# Altium PCB TS04.PcbDoc
Units mm, origin at the board's own origin, x right, y up, seen from the top; angles counter-clockwise.
Board outline 80 x 50 mm, 2 copper layers (Top Layer, Bottom Layer); 39 components, 27 nets, 89 pads, 40 vias.
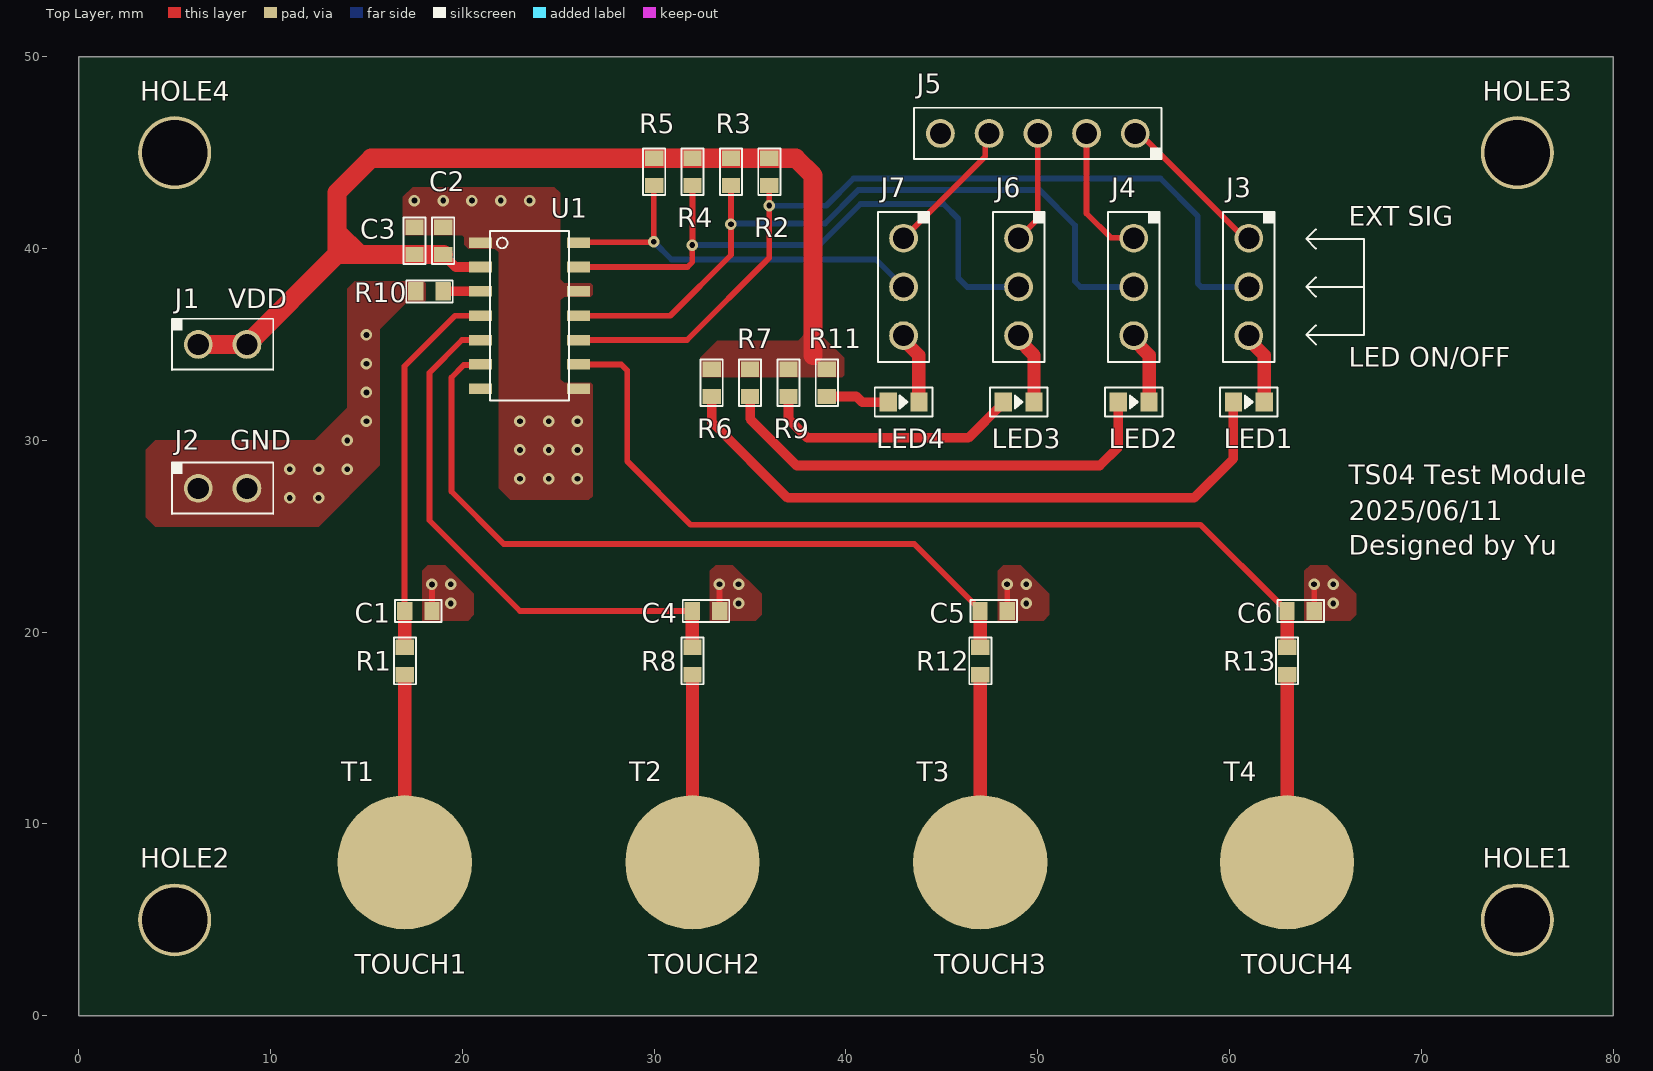
[diagram p0: Top Layer view]
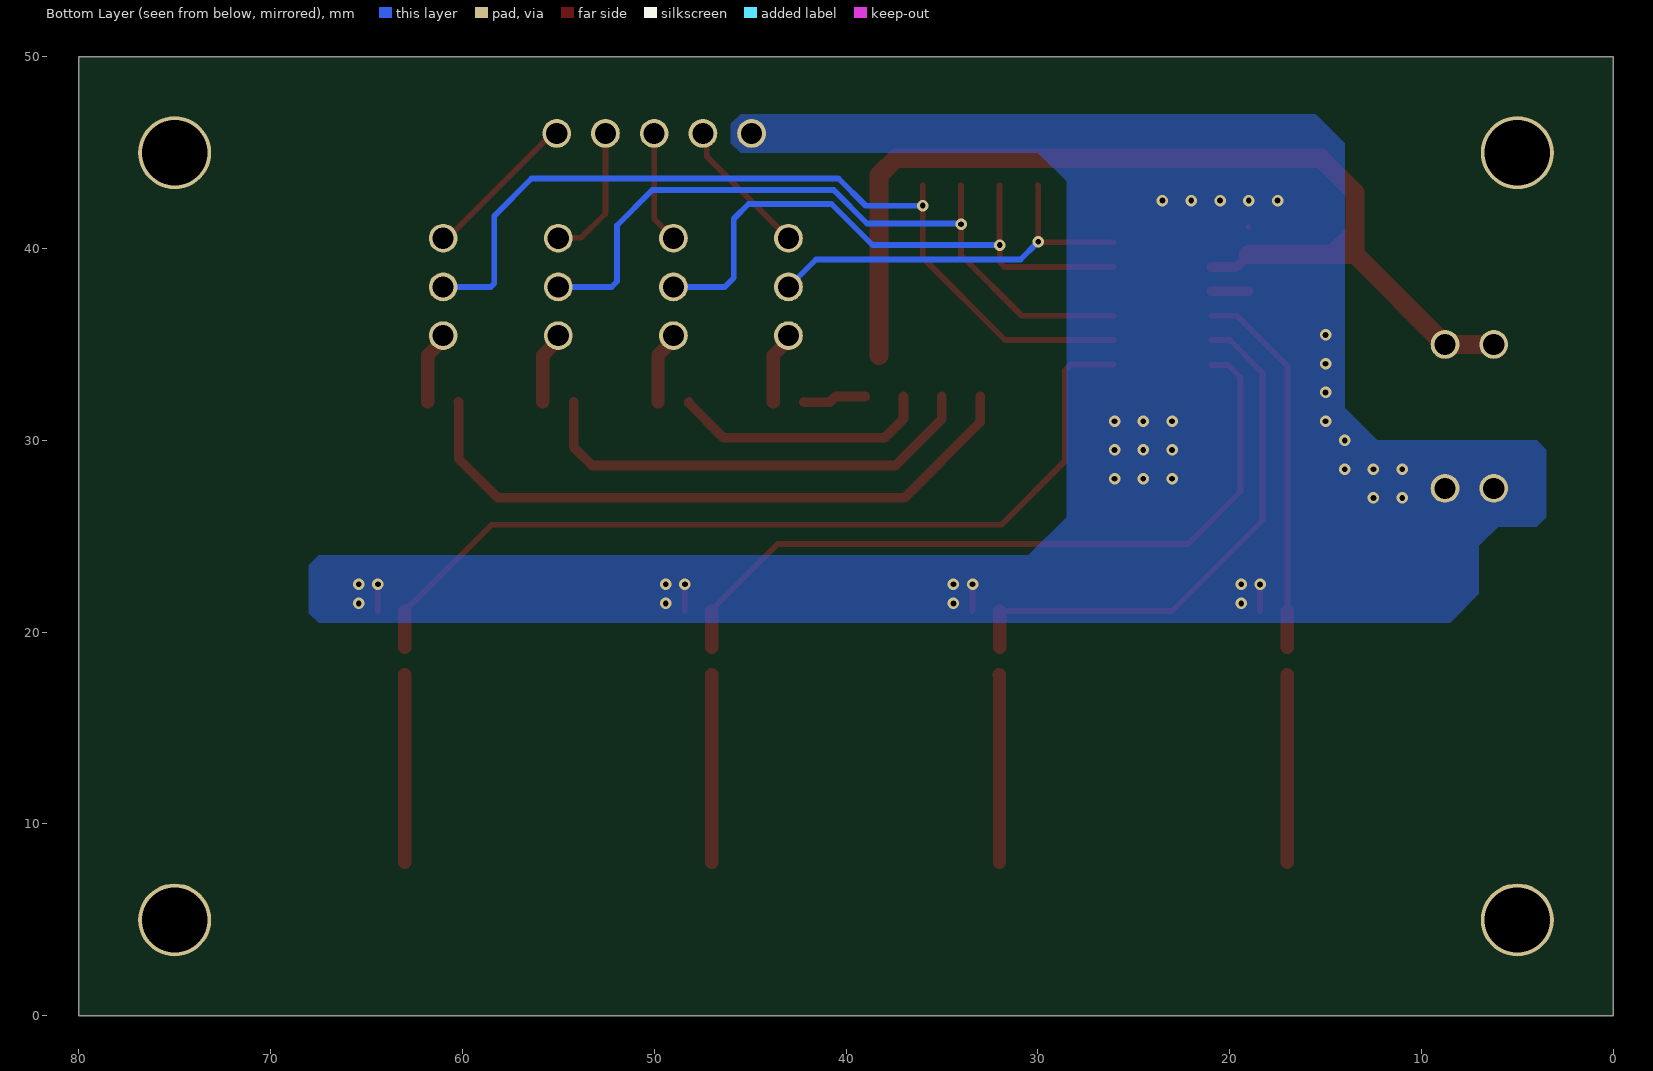
[diagram p1: Bottom Layer view, seen from below]
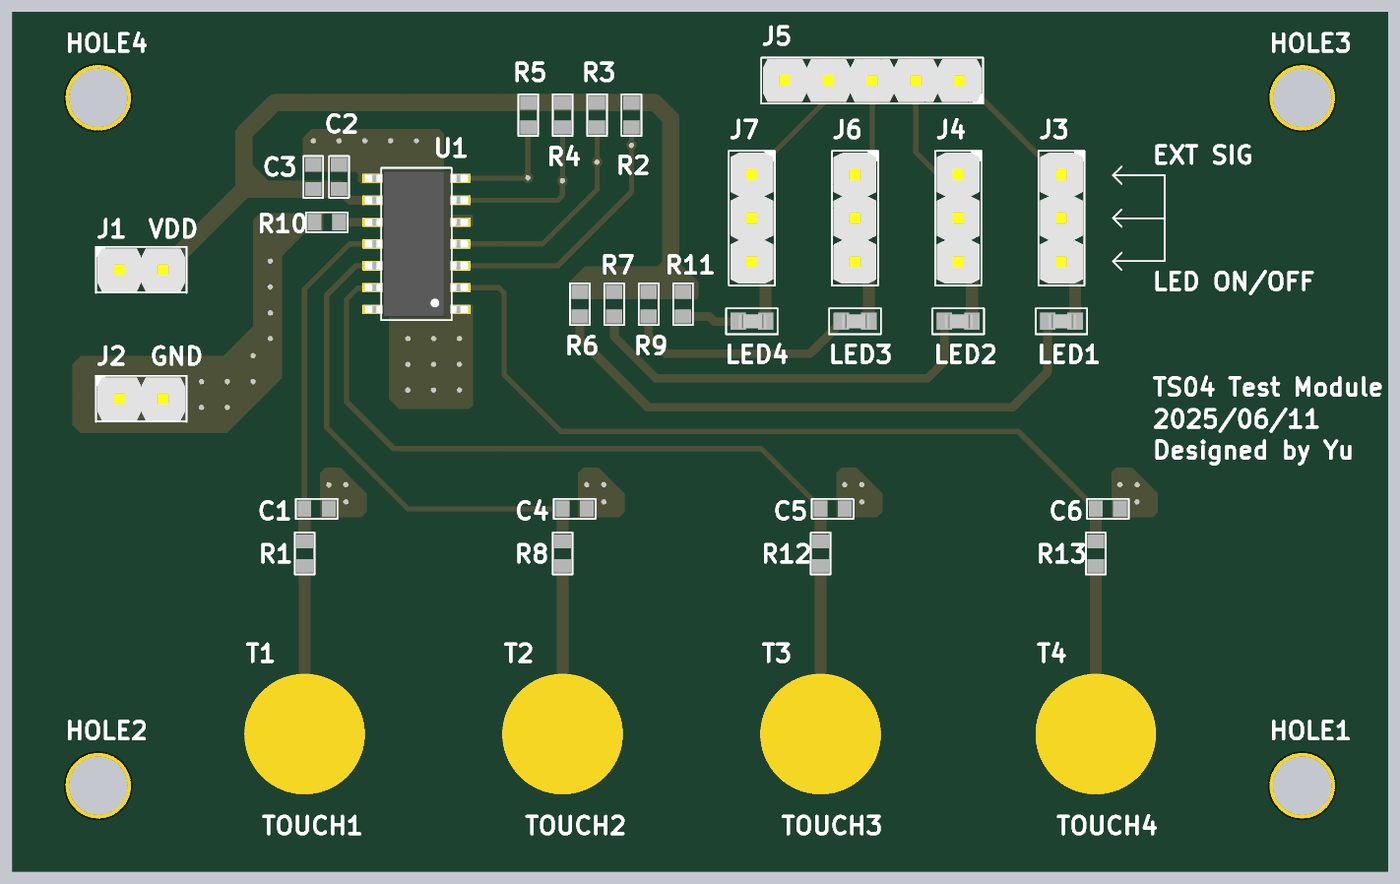
[diagram p2: 3D render of the assembled board from above, using the file's embedded part models]

## Layer stack, top to bottom
Top Solder: solder mask 0.0102, Solder Resist, Dk 3.5
Top Layer: signal copper 0.0356
Dielectric 1: dielectric 0.32, FR-4, Dk 4.8
Bottom Layer: signal copper 0.0356
Bottom Solder: solder mask 0.0102, Solder Resist, Dk 3.5

## Board outline
0,0 0,50 80,50 80,0

## Design rules (kind name [scope] priority, off if disabled: settings)
Clearance [All] p1: gap=0.3 ignorepadtopadclearanceinfootprint=FALSE
HoleSize [All] p1: absolutevalues=TRUE maxlimit=10 minlimit=0.025 maxpercent=80.000 minpercent=20.000
PlaneConnect [All] p1: planeconnectstyle=Direct reliefexpansion=0.508 reliefentries=4 reliefconductorwidth=0.254 reliefairgap=0.254
PolygonConnect [All] p1: connectstyle=Direct reliefconductorwidth=0.254 reliefentries=4 polygonreliefangle="90 Angle" airgapwidth=0.254
RoutingVias [All] p1: holewidth=0.3 width=0.6 viastyle="Through Hole" minholewidth=0.15 minwidth=0.3 maxholewidth=0.5 maxwidth=1
SilkToSolderMaskClearance [IsPad] p1: minsilkscreentomaskgap=0 clearancetoexposedcopper=TRUE
SolderMaskExpansion [All] p1: expansion=0.102 istentingtop=FALSE
SupplyNets "Schematic Supply Nets_1" [InNet('GND')] p1: voltage=0.000
SupplyNets "Schematic Supply Nets" [InNet('VCC')] p2: voltage=0.000
Width [All] p1: maxlimit=1 minlimit=0.05 preferedwidth=0.25
27 further rules are at their usual default settings.

## Components (designator, comment, footprint, x,y, rotation, side; value= is the part's Value field where it differs from the comment)
C1 "10p/50V" C1608 17.7,21.1 r0 top value=100
C2 "100nF/50V" C1608 19,40.4 r90 top value=100
C3 "1uF" C1608 17.5,40.4 r270 top value=100
C4 "10p/50V" C1608 32.7,21.1 r0 top value=100
C5 "10p/50V" C1608 47.7,21.1 r0 top value=100
C6 "10p/50V" C1608 63.7,21.1 r0 top value=100
HOLE1 "Hole" 1.4_pie#1 75,5 r0 top
HOLE2 "Hole" 1.4_pie#1 5,5 r0 top
HOLE3 "Hole" 1.4_pie#2 75.1,44.7 r0 top
HOLE4 "Hole" 1.4_pie#1 5,45 r0 top
J1 "CON2" HEADER_V254_1X2 7.5,35 r0 top
J2 "CON2" HEADER_V254_1X2 7.5,27.5 r0 top
J3 "CON3" HEADER_V254_1X3 61,38 r270 top
J4 "CON3" HEADER_V254_1X3 55,38 r270 top
J5 "CON5" HEADER_V254_1X5 50,46 r180 top
J6 "CON3" HEADER_V254_1X3 49,38 r270 top
J7 "CON3" HEADER_V254_1X3 43,38 r270 top
LED1 "LED" LED/SMD1608 61,32 r180 top
LED2 "LED" LED/SMD1608 55,32 r180 top
LED3 "LED" LED/SMD1608 49,32 r180 top
LED4 "LED" LED/SMD1608 43,32 r180 top
R1 "200R/1608" R1608 17,18.5 r90 top value=100
R2 "10K" R1608 36,44 r90 top value=100
R3 "10K" R1608 34,44 r90 top value=100
R4 "10K" R1608 32,44 r90 top value=100
R5 "10K" R1608 30,44 r90 top value=100
R6 "2K" R1608 33,33 r270 top value=100
R7 "2K" R1608 35,33 r270 top value=100
R8 "200R/1608" R1608 32,18.5 r90 top value=100
R9 "2K" R1608 37,33 r270 top value=100
R10 "510K" R1608 18.287,37.77 r0 top value=100
R11 "2K" R1608 39,33 r270 top value=100
R12 "200R/1608" R1608 47,18.5 r90 top value=100
R13 "200R/1608" R1608 63,18.5 r90 top value=100
T1 "TouchPad" TOUCHPAD 17,8 r0 top
T2 "TouchPad" TOUCHPAD 32,8 r0 top
T3 "TouchPad" TOUCHPAD 47,8 r0 top
T4 "TouchPad" TOUCHPAD 63,8 r0 top
U1 "Capacitive Touch Sensor" TS04_SOP14 23.5,36.5 r0 top

## Footprints (in the part's own frame and the unit in brackets; to place one, negate y for a bottom-side part, rotate by r counter-clockwise, add the part's x,y. Pads: shape width x height; smd on the part's side, far side on the other; paste and mask are expansions set on the pad)
1.4_pie#1 [mm]
  round 3.8 hole 3.4: 1(0,0)
1.4_pie#2 [mm]
  round 3.8 hole 3.4: 1(-0.1,0.3)
C1608 [mm]
  rrect3% 0.8x0.95 smd paste+0 mask+0: 1(-0.713,0)
  rrect3% 0.8x0.95 smd mask+0: 2(0.713,0)
  silkscreen extent -1.21,-0.58 1.21,0.58, body extent -0.8,-0.4 0.8,0.4, height 0.83
HEADER_V254_1X2 [mm] "PIN HEADER 2.54mm 1x2 DIP VERTICAL(STANDARD : SAMTEC)"
  round 1.5 hole 1.1 mask+0: 1(-1.27,0) 2(1.27,0)
  silkscreen extent -2.69,-1.34 2.64,1.34, body extent -2.54,-1.25 2.54,1.24, height 4.97
HEADER_V254_1X3 [mm] "PIN HEADER 2.54mm 1x3 DIP VERTICAL(STANDARD : SAMTEC)"
  round 1.5 hole 1.1 mask+0: 1(-2.54,0) 2(0,0) 3(2.54,0)
  silkscreen extent -3.91,-1.34 3.91,1.34, body extent -3.81,-1.24 3.81,1.24, height 4.97
HEADER_V254_1X5 [mm] "PIN HEADER 2.54mm 1x5 DIP VERTICAL(STANDARD : SAMTEC)"
  round 1.5 hole 1.1 mask+0: 1(-5.08,0) 2(-2.54,0) 3(0,0) 4(2.54,0) 5(5.08,0)
  silkscreen extent -6.45,-1.34 6.45,1.34, body extent -6.35,-1.26 6.35,1.25, height 4.97
LED/SMD1608 [mm]
  rect 0.9x1 smd mask+0: 1(-0.8,0) 2(0.8,0)
  silkscreen extent -1.5,-0.75 1.5,0.75, body extent -0.85,-0.4 0.75,0.4, height 0.82
R1608 [mm]
  rrect3% 0.8x0.95 smd paste+0 mask+0: 1(-0.713,0)
  rrect3% 0.8x0.95 smd mask+0: 2(0.713,0)
  silkscreen extent -1.21,-0.58 1.21,0.58, body extent -0.8,-0.4 0.8,0.4, height 0.83
TOUCHPAD [mm]
  round 7 smd paste-2539.97 mask+0: 1(-0.004,0)
TS04_SOP14 [mm] "AD Semiconductor Touch IC"
  rrect1% 1.2x0.55 smd paste-2539.97 mask+0: 1(-2.55,3.81) 2(-2.55,2.54) 3(-2.55,1.27) 4(-2.55,0) 5(-2.55,-1.27) 6(-2.55,-2.54) 7(-2.55,-3.81) 8(2.55,-3.81) 9(2.55,-2.54) 10(2.55,-1.27) 11(2.55,0) 12(2.55,1.27) 13(2.55,2.54) 14(2.55,3.81)
  silkscreen extent -2.05,-4.43 2.05,4.43, body extent -3,-4.28 3,4.28, height 1.8

## Part data
C1 C2 C3 C4 C5 C6: library part CHIP_CAP, "SMD TYPE CAPACITOR"
R1 R2 R3 R4 R5 R6 R7 R8 R9 R10 R11 R12 R13: library part CHIP_RES, "SMD TYPE RESISTOR"
U1: library part TS04_SOP14, "Capacitive Touch Sensor from AD Semiconductor SOP14 Type"

## Via types
v1: diameter 0.6, hole 0.3, Top Layer to Bottom Layer, tented both sides, 40 vias

## Nets (pads, with @x,y where several pads share a name; then routed paths per layer and width w, separated by ;. In a path a pad name is that pad's centre, name@x,y a point inside that pad or via, vN(x,y) a via of type N, cw(c..) or ccw(c..) an arc to the next point about the centre after c; other vN are vias at no path point)
EXT1: J3.1 J5.1 | length 8.2
  Top Layer w0.3: J5.1 55.31,46 60.77,40.54 J3.1
EXT2: J4.1 J5.2 | length 7.2
  Top Layer w0.3: J5.2 52.54,41.83 53.8,40.57 54.97,40.57 J4.1
EXT3: J5.3 J6.1 | length 5.9
  Top Layer w0.3: J6.1 50,41.54 J5.3
EXT4: J5.4 J7.1 | length 7.3
  Top Layer w0.3: J7.1 47.26,44.8 47.26,45.8 J5.4
GND: C1.2 C2.2 C3.1 C4.2 C5.2 C6.2 J2.1 J2.2 J5.5 R10.1 U1.1 U1.8 U1.12 | length 5.6
  Top Layer w0.3: C1.2 v1(18.413,22.487) ; v1(33.4,22.5) 33.407,22.493 33.407,21.106 C4.2 ; v1(48.4,22.5) 48.413,22.487 C5.2 ; v1(64.4,22.5) 64.413,22.487 C6.2
  Bottom Layer w0.3: v1@18.407,22.493 v1(18.413,22.487)
  other v1: 19.4,21.5 34.4,21.5 49.4,21.5 65.4,21.5 19.4,22.5 34.4,22.5 49.4,22.5 65.4,22.5 11,27 12.5,27 23,28 24.5,28 26,28 11,28.5 12.5,28.5 14,28.5 23,29.5 24.5,29.5 26,29.5 14,30 15,31 23,31 24.5,31 26,31 15,32.5 15,34 15,35.5 17.5,42.5 19,42.5 20.5,42.5 22,42.5 23.5,42.5
LED1: J3.3 LED1.1 | length 3.8
  Top Layer w0.7: J3.3 61,35.244 61.8,34.444 LED1.1
LED2: J4.3 LED2.1 | length 3.8
  Top Layer w0.7: J4.3 55,35.244 55.8,34.444 LED2.1
LED3: J6.3 LED3.1 | length 3.8
  Top Layer w0.7: J6.3 49,35.244 49.8,34.444 LED3.1
LED4: J7.3 LED4.1 | length 3.8
  Top Layer w0.7: J7.3 43,35.244 43.8,34.444 LED4.1
NetLED1_2: LED1.2 R6.2 | length 34
  Top Layer w0.5: R6.2 33,30.96 36.96,27 58.15,27 60.19,29.04 60.19,31.99 LED1.2
NetLED2_2: LED2.2 R7.2 | length 24.1
  Top Layer w0.5: R7.2 35,31.12 37.43,28.69 53.23,28.69 54.2,29.66 LED2.2
NetLED3_2: LED3.2 R9.2 | length 13.6
  Top Layer w0.5: R9.2 37,31.12 37.99,30.13 46.38,30.13 48.2,31.95 LED3.2
NetLED4_2: LED4.2 R11.2 | length 3.3
  Top Layer w0.5: R11.2 40.543,32.287 40.84,31.99 42.19,31.99 LED4.2
NetR1_1: R1.1 T1.1 | length 9.8
  Top Layer w0.7: T1.1 16.998,8.002 16.998,17.786 R1.1
NetR8_1: R8.1 T2.1 | length 9.8
  Top Layer w0.7: T2.1 31.998,8.002 31.998,17.786 R8.1
NetR10_2: R10.2 U1.3 | length 1.9
  Top Layer w0.5: R10.2 U1.3
NetR12_1: R12.1 T3.1 | length 9.8
  Top Layer w0.7: T3.1 46.998,8.002 46.998,17.785 R12.1
NetR13_1: R13.1 T4.1 | length 9.8
  Top Layer w0.7: T4.1 T4.1 62.998,17.785 R13.1
OUT1: J3.2 R2.1 U1.10 | length 45.5
  Top Layer w0.3: U1.10 31.71,35.23 36,39.52 v1(36,42.24) R2.1
  Bottom Layer w0.3: v1(36,42.24) 36.01,42.23 38.971,42.23 40.391,43.65 56.39,43.65 58.34,41.7 58.34,38.176 58.516,38 J3.2
OUT2: J4.2 R3.1 U1.11 | length 38.4
  Top Layer w0.3: U1.11 30.84,36.5 34,39.66 v1(34,41.27) R3.1
  Bottom Layer w0.3: v1(34,41.27) 34.04,41.31 38.9,41.31 40.64,43.05 50.1,43.05 51.94,41.21 51.94,38.29 52.23,38 J4.2
OUT3: J6.2 R4.1 U1.13 | length 31.5
  Top Layer w0.3: U1.13 31.73,39.04 31.99,39.3 v1(31.99,40.18) ; v1@32,40.18 R4.1
  Bottom Layer w0.3: v1(31.99,40.18) 38.619,40.18 40.759,42.32 45.08,42.32 45.85,41.55 45.85,38.47 46.32,38 J6.2
OUT4: J7.2 R5.1 U1.14 | length 20.9
  Top Layer w0.3: U1.14 26.07,40.33 29.96,40.33 v1(29.98,40.35) 29.98,43.268 R5.1
  Bottom Layer w0.3: v1(29.98,40.35) 30.9,39.43 41.57,39.43 J7.2
TOUCH1: C1.1 R1.2 U1.4 | length 19.7
  Top Layer w0.3: C1.1 16.987,33.868 19.62,36.5 U1.4
  Top Layer w0.7: C1.1 16.994,21.094 16.994,19.219 R1.2
TOUCH2: C4.1 R8.2 U1.5 | length 28.6
  Top Layer w0.3: U1.5 19.98,35.23 18.28,33.53 18.28,25.83 23.01,21.1 C4.1 C4.1@31.994,21.094 ; R8.2@31.994,19.219 R8.2
  Top Layer w0.7: R8.2@31.994,19.219 C4.1@31.994,21.094
TOUCH3: C5.1 R12.2 U1.6 | length 39.8
  Top Layer w0.3: U1.6 20.916,33.926 20.076,33.926 19.43,33.281 19.43,27.33 22.16,24.6 43.562,24.6 46.988,21.175 C5.1 C5.1@46.994,21.094 ; R12.2@46.994,19.219 R12.2
  Top Layer w0.7: R12.2@46.994,19.219 C5.1@46.994,21.094
TOUCH4: C6.1 R13.2 U1.9 | length 47
  Top Layer w0.3: U1.9 28.28,33.96 28.59,33.65 28.59,28.91 31.9,25.6 58.487,25.6 62.662,21.425 62.737,21.425 62.994,21.169 C6.1@62.994,21.094
  Top Layer w0.7: C6.1@62.994,21.094 62.994,19.219 R13.2
VCC: C2.1 C3.2 J1.1 J1.2 R2.2 R3.2 R4.2 R5.2 R6.1 R7.1 R9.1 R11.1 U1.2 | length 57.2
  Top Layer w0.5: C2.1 19.075,39.688 19.225,39.537 19.225,39.462 19.648,39.04 U1.2
  Top Layer w1: J1.1 J1.2 13.457,39.688 ; C3.2 14.65,39.688 ; C3.2 C2.1 ; 38.288,34.425 38.288,43.806 37.38,44.713 R2.2 R3.2 R4.2 R5.2 15.253,44.713 13.457,42.917 13.457,40.88 ; 13.457,39.688 14.65,39.688 ; 13.457,39.688 13.457,40.88 ; 13.457,40.88 14.65,39.688
pads on no net: HOLE1.1 HOLE2.1 HOLE3.1 HOLE4.1 U1.7

## Polygon pours and split planes (outlines as drawn)
GND on Top Layer "NONET_L01_P-001" (solid, pour order 8): 18.1,37.3 18,37.2 17.1,37.2 15.7,35.8 15.7,28.7 12.5,25.5 4,25.5 3.5,26 3.5,29.5 4,30 12.3,30 14,31.7 14,37.9 14.4,38.3 18,38.3 18.1,38.2
GND on Top Layer "NONET_L01_P-001" (solid, pour order 7): 21.9,27.5 22.5,26.9 26.6,26.9 26.8,27.1 26.8,32.9 26.7,33 25.3,33 25.1,33.2 25.1,37.3 25.3,37.5 26.7,37.5 26.8,37.6 26.8,38.1 26.7,38.2 25.3,38.2 25.1,38.4 25.1,42.9 24.8,43.2 17.4,43.2 16.9,42.7 16.9,40.8 17,40.7 20,40.7 20.1,40.6 20.1,40.2 20.3,40 21.7,40 21.9,39.8
GND on Top Layer "NONET_L01_P-001" (solid, pour order 6): 64.9,20.6 64.8,20.5 64,20.5 63.9,20.6 63.9,23.2 64.2,23.5 65.1,23.5 66.6,22 66.6,20.9 66.3,20.6
GND on Top Layer "NONET_L01_P-001" (solid, pour order 5): 48.9,20.6 48.8,20.5 48,20.5 47.9,20.6 47.9,23.2 48.2,23.5 49.1,23.5 50.6,22 50.6,20.9 50.3,20.6
GND on Top Layer "NONET_L01_P-001" (solid, pour order 4): 33.9,20.6 33.8,20.5 33,20.5 32.9,20.6 32.9,23.2 33.2,23.5 34.1,23.5 35.6,22 35.6,20.9 35.3,20.6
GND on Top Layer "NONET_L01_P-001" (solid, pour order 3): 18.9,20.6 18.8,20.5 18,20.5 17.9,20.6 17.9,23.2 18.2,23.5 19.1,23.5 20.6,22 20.6,20.9 20.3,20.6
VCC on Top Layer "NONET_L01_P-001" (solid, pour order 0): 32.5,33.3 32.4,33.4 32.4,34.3 33.3,35.2 37.5,35.2 37.9,35.6 38.6,35.6 39,35.2 39.9,34.3 39.9,33.4 39.8,33.3
GND on Bottom Layer "NONET_L01_P-001" (solid, pour order 2): 12.3,30 14,31.7 14,45.5 15.5,47 45.5,47 46,46.5 46,45.5 45.5,45 30,45 28.5,43.5 28.5,26 30.5,24 67.5,24 68,23.5 68,21 67.5,20.5 8.5,20.5 7,22 7,24.5 6,25.5 4,25.5 3.5,26 3.5,29.5 4,30

## Silkscreen, mask and mechanical layers (free items; w line width, h text height)
Top Overlay:
  lines w0.1: 64.5,35 64,35.5 ; 64.5,36 64,35.5 ; 64.5,37.5 64,38 ; 64.5,38.5 64,38 ; 64.5,40 64,40.5 ; 64.5,41 64,40.5 ; 64,35.5 64,35.5 ; 64,35.5 64,35.5 ; 64,35.5 67,35.5 67,38 ; 64,38 64,38 ; 64,38 64,38 ; 64,38 67,38 ; 64,40.5 64,40.5 ; 64,40.5 67,40.5 67,38
  text "EXT SIG" at 66.2,41.2 h1
  text "VDD" at 7.8,36.9 h1
  text "LED ON/OFF" at 66.2,33.843 h1
  text "GND" at 7.9,29.5 h1
  text "TS04 Test Module" at 66.2,27.7 h1
  text "2025/06/11" at 66.2,25.843 h1
  text "Designed by Yu" at 66.2,24.033 h1
  text "TOUCH1" at 14.4,2.2 h1
  text "TOUCH2" at 29.7,2.2 h1
  text "TOUCH3" at 44.6,2.2 h1
  text "TOUCH4" at 60.6,2.2 h1
Mechanical 1:
  the board outline again, w0.1